# EAGLE board medidor-2 (EAGLE 9.6.2)
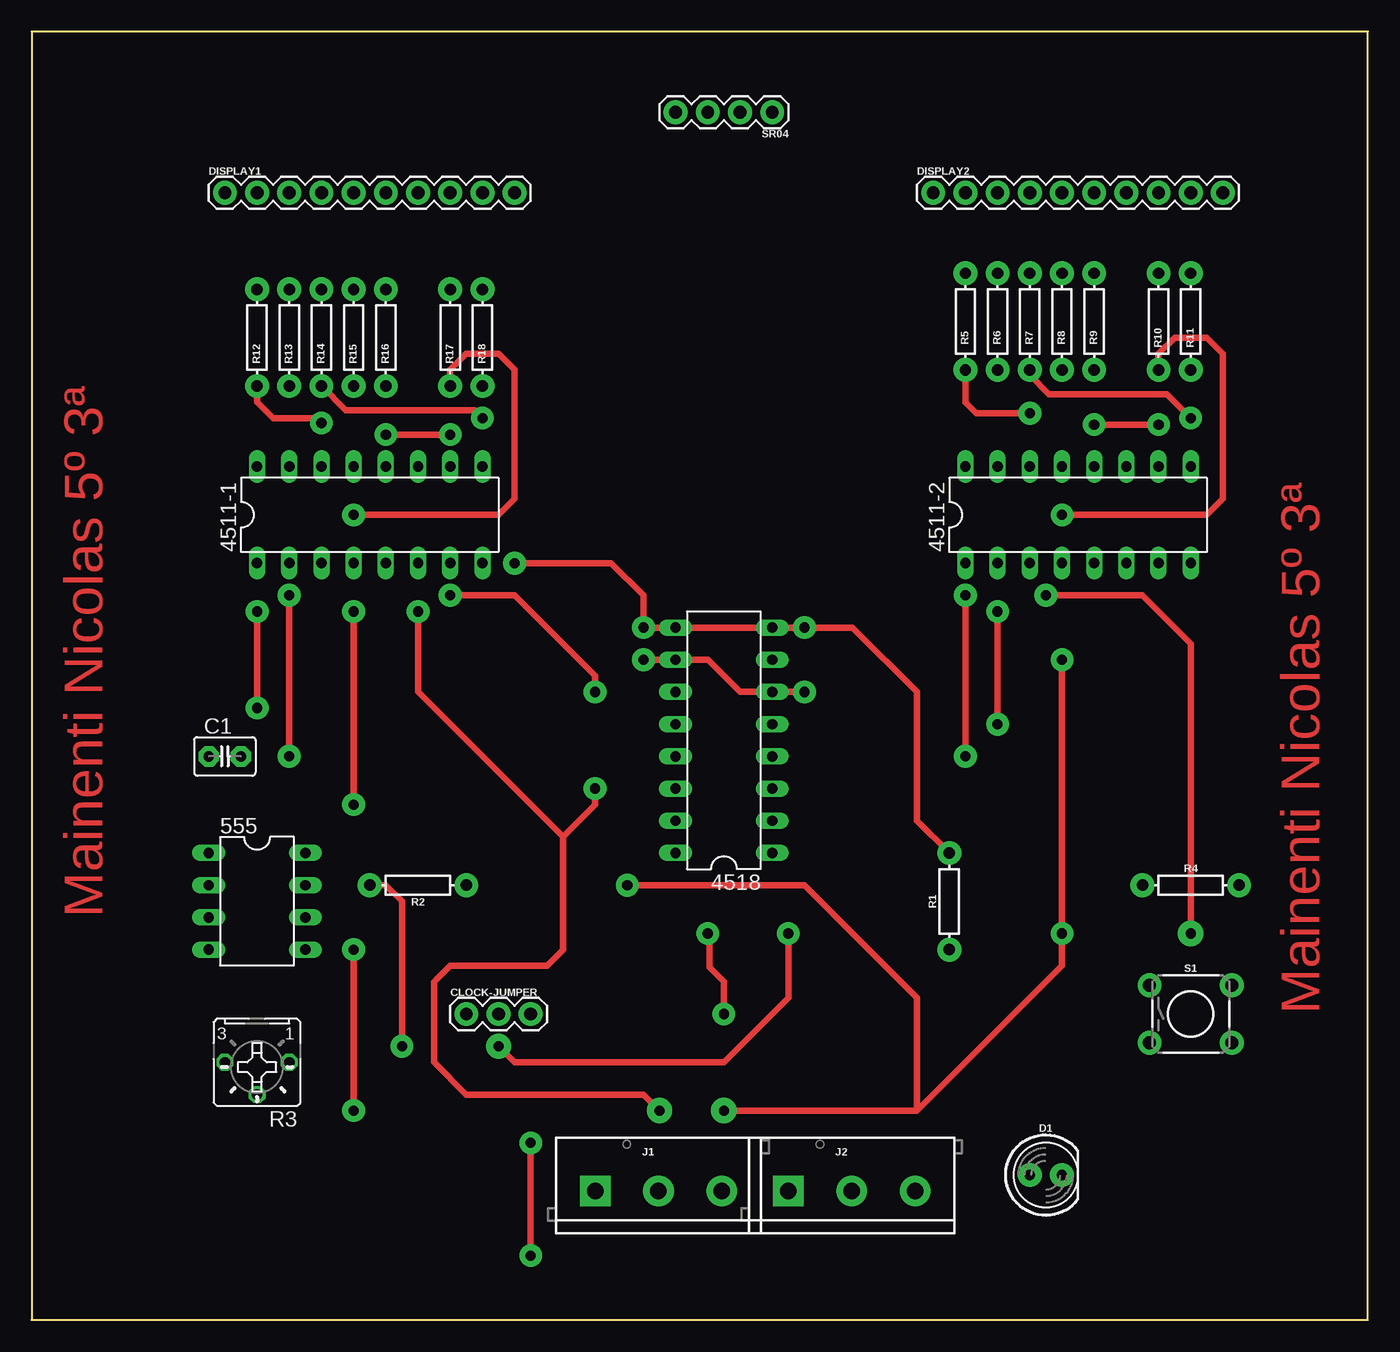
[diagram p0: board, top side]
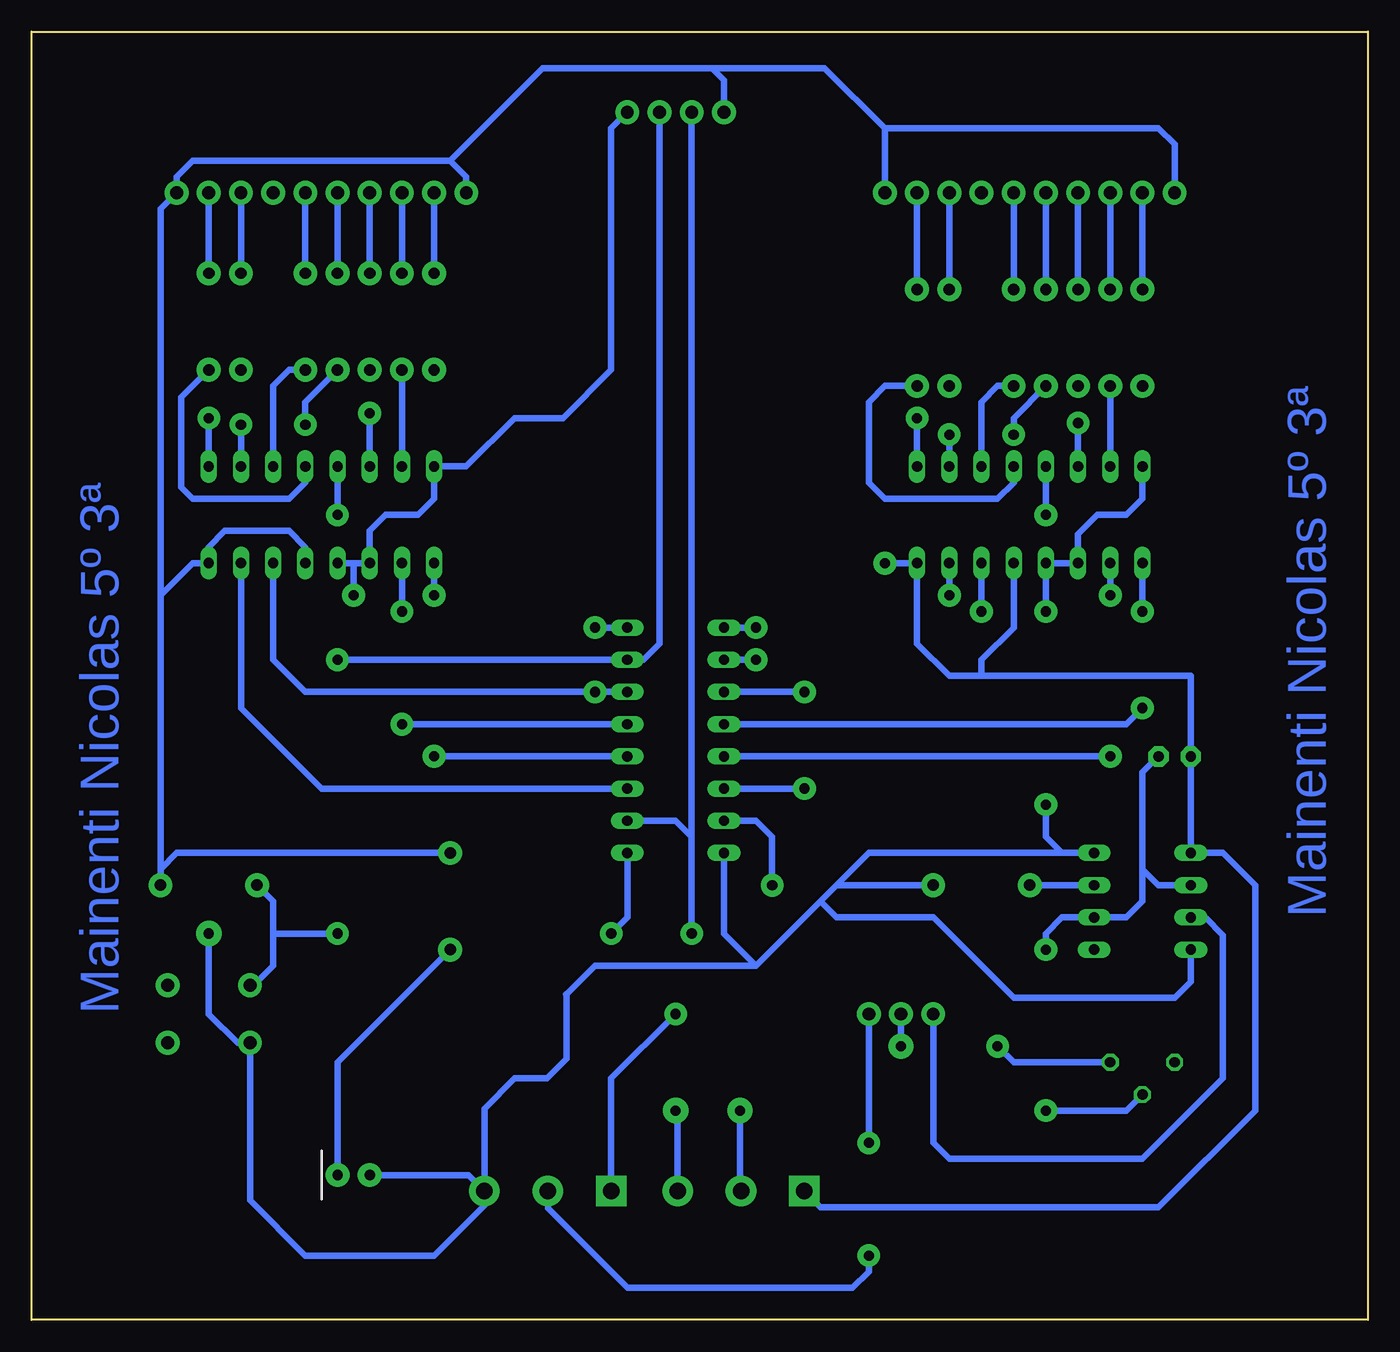
[diagram p1: board, bottom side, seen from below]

Size 105.41 x 101.6 mm. Coordinates in mm from the lower left corner, seen from the top.
Outline: 0,0 105.41,0 105.41,101.6 0,101.6 0,0
Copper layers (1*16): Top 0.035mm / dielectric 1.5mm / Bottom 0.035mm
Design rules "default": minimum track width 6mil, minimum drill 0.35mm, track to track 6mil, track to pad 6mil, pad to pad 6mil, via to via 6mil, smd to smd 6mil, copper to edge 40mil, drill to drill 6mil, minimum pad ring 10mil, minimum via ring 8mil, stop-mask expansion 4mil, vias tented up to drill 0mil, thermal gap 10mil

## Footprints (pad centres in the part's own frame; a part is rotated, then mirrored left to right if it is on the bottom)
DIL08 = drill 0.813 long: 1 -3.81,-3.81; 2 -1.27,-3.81; 3 1.27,-3.81; 4 3.81,-3.81; 5 3.81,3.81; 6 1.27,3.81; 7 -1.27,3.81; 8 -3.81,3.81
DIL16 = drill 0.813 long: 1 -8.89,-3.81; 2 -6.35,-3.81; 3 -3.81,-3.81; 4 -1.27,-3.81; 5 1.27,-3.81; 6 3.81,-3.81; 7 6.35,-3.81; 8 8.89,-3.81; 9 8.89,3.81; 10 6.35,3.81; 11 3.81,3.81; 12 1.27,3.81; 13 -1.27,3.81; 14 -3.81,3.81; 15 -6.35,3.81; 16 -8.89,3.81
C2.5-3 = drill 0.813 pad 1.6 octagon: 1 -1.27,0; 2 1.27,0
1X03 = drill 1.016 pad 1.88: 1 0,0; 2 2.54,0; 3 5.08,0
LED_5MM = drill 0.813 pad 1.88: A -1.27,0; K 1.27,0
1X10 = drill 1.016 pad 1.88: 1 0,0; 2 2.54,0; 3 5.08,0; 4 7.62,0; 5 10.16,0; 6 12.7,0; 7 15.24,0; 8 17.78,0; 9 20.32,0; 10 22.86,0
SCREWTERMINAL-5MM-3 = drill 1.3 pad 2.413 square: 1 0,0 | drill 1.3 pad 2.413: 2 5,0; 3 10,0
AXIAL-0.3 = drill 0.9 pad 1.88: P$1 -3.81,0; P$2 3.81,0
B25P = drill 0.813 octagon: A -2.54,0; E 2.54,0; S 0,2.54
TACTILE_SWITCH_PTH_6.0MM = drill 1.016 pad 1.88: 1 -3.251,2.261; 2 3.251,2.261; 3 -3.251,-2.261; 4 3.251,-2.261
1X04 = drill 1.016 pad 1.88: 1 0,0; 2 2.54,0; 3 5.08,0; 4 7.62,0

## Placement (x,y rotation side)
555  [DIL08]  17.78,33.02 270 top
4511-1  [DIL16]  26.67,63.5 0 top
4511-2  [DIL16]  82.55,63.5 0 top
4518  [DIL16]  54.61,45.72 90 top
C1  23nF  [C2.5-3]  15.24,44.45 0 top
CLOCK-JUMPER  455-1750-1-ND  [1X03]  34.29,24.13 0 top
D1  [LED_5MM]  80.01,11.43 0 top
DISPLAY1  [1X10]  15.24,88.9 0 top
DISPLAY2  [1X10]  71.12,88.9 0 top
J1  [SCREWTERMINAL-5MM-3]  44.45,10.16 0 top
J2  [SCREWTERMINAL-5MM-3]  59.69,10.16 0 top
R1  330  [AXIAL-0.3]  72.39,33.02 90 top
R2  2.2k  [AXIAL-0.3]  30.48,34.29 180 top
R3  5k  [B25P]  17.78,20.32 180 top
R4  10k  [AXIAL-0.3]  91.44,34.29 0 top
R5  330  [AXIAL-0.3]  73.66,78.74 90 top
R6  330  [AXIAL-0.3]  76.2,78.74 90 top
R7  330  [AXIAL-0.3]  78.74,78.74 90 top
R8  330  [AXIAL-0.3]  81.28,78.74 90 top
R9  330  [AXIAL-0.3]  83.82,78.74 90 top
R10  330  [AXIAL-0.3]  88.9,78.74 90 top
R11  330  [AXIAL-0.3]  91.44,78.74 90 top
R12  330  [AXIAL-0.3]  17.78,77.47 90 top
R13  330  [AXIAL-0.3]  20.32,77.47 90 top
R14  330  [AXIAL-0.3]  22.86,77.47 90 top
R15  330  [AXIAL-0.3]  25.4,77.47 90 top
R16  330  [AXIAL-0.3]  27.94,77.47 90 top
R17  330  [AXIAL-0.3]  33.02,77.47 90 top
R18  330  [AXIAL-0.3]  35.56,77.47 90 top
S1  MOMENTARY-SWITCH-SPST-PTH-6.0MM  [TACTILE_SWITCH_PTH_6.0MM]  91.44,24.13 0 top
SR04  [1X04]  58.42,95.25 180 top

## Library data of the parts
555 4511-1 4511-2 4518 = ic-package
C1 = capacitor-wima
CLOCK-JUMPER = SparkFun-Connectors; PROD_ID: XXX-00000
D1 = SparkFun-LED
DISPLAY1 DISPLAY2 = SparkFun-Connectors; PROD_ID: CONN-11563
J1 J2 = SparkFun-Connectors; PROD_ID: CONN-10134; SF_SKU: PRT-08433
R1 R2 R4-R18 = SparkFun-Resistors; PROD_ID: RES-09435
R3 = pot
S1 = SparkFun-Switches; PROD_ID: SWCH-08441; SF_SKU: COM-00097
SR04 = SparkFun-Connectors; PROD_ID: CONN-09696

## Nets
1-A: 4511-2.7 4518.3
1-B: 4511-2.1 4518.4
1-C: 4511-2.2 4518.5
1-D: 4511-2.6 4518.6 4518.10
2-A: 4511-1.7 4518.11
2-B: 4511-1.1 4518.12
2-C: 4511-1.2 4518.13
2-D: 4511-1.6 4518.14 J1.2
5V: 555.4 555.8 4511-1.3 4511-1.4 4511-1.16 4511-2.3 4511-2.4 4511-2.16 4518.16 D1.A J2.3 R2.P$1 S1.3 SR04.1
CLOCK-555: 555.3 CLOCK-JUMPER.1
CLOCK-A: 4518.1 CLOCK-JUMPER.2
CLOCK-EXT: CLOCK-JUMPER.3 J2.2
D1-A: 4511-1.13 R17.P$1
D1-B: 4511-1.12 R18.P$1
D1-C: 4511-1.11 R16.P$1
D1-D: 4511-1.10 R15.P$1
D1-E: 4511-1.9 R14.P$1
D1-F: 4511-1.15 R13.P$1
D1-G: 4511-1.14 R12.P$1
D2-A: 4511-2.13 R10.P$1
D2-B: 4511-2.12 R11.P$1
D2-C: 4511-2.11 R9.P$1
D2-D: 4511-2.10 R8.P$1
D2-E: 4511-2.9 R7.P$1
D2-F: 4511-2.15 R6.P$1
D2-G: 4511-2.14 R5.P$1
ENABLE-A: 4518.2 J2.1 SR04.3
GND: 555.1 4511-1.5 4511-1.8 4511-2.5 4511-2.8 4518.8 4518.9 C1.1 DISPLAY1.1 DISPLAY1.10 DISPLAY2.1 DISPLAY2.10 J1.1 R1.P$2 R4.P$2 SR04.4
N$1: D1.K R1.P$1
N$2: DISPLAY1.2 R12.P$2
N$3: 555.7 R2.P$2 R3.A
N$5: 555.2 555.6 C1.2 R3.S
N$6: DISPLAY1.3 R13.P$2
N$7: DISPLAY1.4 R14.P$2
N$8: DISPLAY1.5 R15.P$2
N$9: DISPLAY1.6 R16.P$2
N$10: DISPLAY1.8 R17.P$2
N$11: DISPLAY1.9 R18.P$2
N$12: DISPLAY2.2 R5.P$2
N$13: DISPLAY2.3 R6.P$2
N$14: DISPLAY2.4 R7.P$2
N$15: DISPLAY2.5 R8.P$2
N$16: DISPLAY2.6 R9.P$2
N$17: DISPLAY2.8 R10.P$2
N$18: DISPLAY2.9 R11.P$2
RESET-A-B: 4518.7 4518.15 J1.3 R4.P$1 S1.1 SR04.2

## Tracks (layer width: path | path; a pad name or v marks a point on that pad's centre or on a via)
1-A
  Bottom 0.508: 4518.3 82.55,41.91 88.9,48.26 4511-2.7
1-B  (via drill 0.8 pad 1.8)
  Top 0.508: v73.66,57.15 v73.66,44.45
  Bottom 0.508: v73.66,57.15 4511-2.1 | 4518.4 v73.66,44.45
1-C  (via drill 0.8 pad 1.8)
  Top 0.508: v76.2,46.99 v76.2,55.88
  Bottom 0.508: 4518.5 v76.2,46.99 | 4511-2.2 v76.2,55.88
1-D  (via drill 0.8 pad 1.8)
  Top 0.508: v48.26,52.07 53.34,52.07 55.88,49.53 v60.96,49.53
  Bottom 0.508: 4518.6 v60.96,49.53 83.82,49.53 86.36,52.07 4511-2.6 | 4518.10 v48.26,52.07
2-A  (via drill 0.8 pad 1.8)
  Top 0.508: v33.02,57.15 38.1,57.15 44.45,50.8 v44.45,49.53
  Bottom 0.508: 4518.11 v44.45,49.53 | 4511-1.7 v33.02,57.15
2-B  (via drill 0.8 pad 1.8)
  Top 0.508: v17.78,55.88 v17.78,48.26
  Bottom 0.508: 4511-1.1 v17.78,55.88 | v17.78,48.26 19.05,46.99 4518.12
2-C  (via drill 0.8 pad 1.8)
  Top 0.508: v20.32,44.45 v20.32,57.15
  Bottom 0.508: 4511-1.2 v20.32,57.15 | 4518.13 v20.32,44.45
2-D  (via drill 0.8 pad 1.8, 0.8 pad 2)
  Top 0.508: 41.91,38.1 41.91,29.21 40.64,27.94 33.02,27.94 31.75,26.67 31.75,20.32 34.29,17.78 48.26,17.78 v49.53,16.51 | 41.91,38.1 30.48,49.53 v30.48,55.88 | 41.91,38.1 44.45,40.64 v44.45,41.91
  Bottom 0.508: v49.53,16.51 49.53,10.24 J1.2 | v44.45,41.91 4518.14 | 4511-1.6 v30.48,55.88
5V  (via drill 0.8 pad 1.78, 0.8 pad 1.8, 0.8 pad 2)
  Top 0.508: v25.4,40.64 v25.4,55.88 | v80.01,57.15 87.63,57.15 91.44,53.34 v91.44,30.48
  Bottom 0.508: 63.22,25.68 60.96,27.94 48.26,27.94 | 48.26,27.94 43.18,33.02 | 43.18,33.02 41.91,34.29 | 41.91,34.29 R2.P$1 | 41.91,34.29 39.37,36.83 24.13,36.83 | 24.13,36.83 555.8 | 43.18,33.02 41.91,31.75 34.29,31.75 27.94,25.4 15.24,25.4 13.97,26.67 555.4 | v25.4,55.88 4511-1.4 4511-1.3 22.86,61.98 21.34,63.5 19.05,63.5 17.78,64.77 4511-1.16 | v25.4,40.64 25.4,38.1 24.13,36.83 | 63.22,25.68 63.25,25.71 | 4511-2.4 80.01,59.69 | 80.01,59.69 4511-2.3 78.74,62.23 77.47,63.5 74.93,63.5 73.66,64.77 4511-2.16 71.12,67.31 67.31,71.12 63.5,71.12 59.69,74.93 59.69,93.98 SR04.1 | 80.01,59.69 v80.01,57.15 | J2.3 69.69,9.05 73.66,5.08 83.82,5.08 88.19,9.45 S1.3 89.18,21.87 91.44,24.13 v91.44,30.48 | D1.A 70.96,11.43 J2.3 | J2.3 69.69,16.67 67.31,19.05 64.77,19.05 63.22,20.6 63.22,25.68 | 4518.16 50.8,30.48 48.26,27.94
CLOCK-555
  Bottom 0.508: CLOCK-JUMPER.1 34.29,13.97 33.02,12.7 17.78,12.7 11.43,19.05 11.43,30.35 12.83,31.75 555.3
CLOCK-A  (via drill 0.8 pad 1.8, 0.8 pad 2)
  Top 0.508: v36.83,21.59 38.1,20.32 54.61,20.32 59.69,25.4 v59.69,30.48
  Bottom 0.508: v36.83,21.59 CLOCK-JUMPER.2 | v59.69,30.48 58.42,31.75 4518.1
CLOCK-EXT  (via drill 0.8 pad 1.78)
  Top 0.508: v39.37,13.97 v39.37,5.08
  Bottom 0.508: CLOCK-JUMPER.3 v39.37,13.97 | v39.37,5.08 39.37,3.81 40.64,2.54 58.42,2.54 64.69,8.81 J2.2
D1-A  (via drill 0.8 pad 1.78)
  Top 0.508: v25.4,63.5 36.83,63.5 38.1,64.77 38.1,74.93 36.83,76.2 34.29,76.2 33.02,74.93 R17.P$1
  Bottom 0.508: v25.4,63.5 4511-1.13
D1-B
  Bottom 0.508: R18.P$1 38.1,73.66 39.37,72.39 39.37,66.04 38.1,64.77 29.21,64.77 27.94,66.04 4511-1.12
D1-C
  Bottom 0.508: R16.P$1 29.21,73.66 30.48,72.39 4511-1.11
D1-D  (via drill 0.8 pad 1.78)
  Top 0.508: v27.94,69.83 v33.02,69.83
  Bottom 0.508: R15.P$1 27.94,71.12 v27.94,69.83 | v33.02,69.83 4511-1.10
D1-E  (via drill 0.8 pad 1.78)
  Top 0.508: v35.56,71.12 34.92,71.75 24.77,71.75 R14.P$1
  Bottom 0.508: v35.56,71.12 4511-1.9
D1-F
  Bottom 0.508: R13.P$1 4511-1.15
D1-G  (via drill 0.8 pad 1.78)
  Top 0.508: v22.86,70.74 22.48,71.12 19.05,71.12 17.78,72.39 R12.P$1
  Bottom 0.508: v22.86,70.74 4511-1.14
D2-A  (via drill 0.8 pad 1.78)
  Top 0.508: v81.28,63.5 92.71,63.5 93.98,64.77 93.98,76.2 92.71,77.47 90.17,77.47 88.9,76.2 R10.P$1
  Bottom 0.508: v81.28,63.5 4511-2.13
D2-B
  Bottom 0.508: R11.P$1 93.6,72.77 93.6,65.66 92.71,64.77 85.09,64.77 83.82,66.04 4511-2.12
D2-C
  Bottom 0.508: R9.P$1 85.09,74.93 86.36,73.66 4511-2.11
D2-D  (via drill 0.8 pad 1.78)
  Top 0.508: v83.82,70.61 v88.9,70.61
  Bottom 0.508: R8.P$1 83.82,72.39 v83.82,70.61 | v88.9,70.61 4511-2.10
D2-E  (via drill 0.8 pad 1.78)
  Top 0.508: v91.44,71.12 89.53,73.03 80.26,73.03 78.74,74.55 R7.P$1
  Bottom 0.508: v91.44,71.12 4511-2.9
D2-F
  Bottom 0.508: R6.P$1 4511-2.15
D2-G  (via drill 0.8 pad 1.8)
  Top 0.508: v78.74,71.5 74.55,71.5 73.66,72.39 R5.P$1
  Bottom 0.508: v78.74,71.5 4511-2.14
ENABLE-A  (via drill 0.8 pad 1.78)
  Top 0.508: v53.34,30.48 53.47,30.35 53.47,27.81 54.61,26.67 v54.61,24.13
  Bottom 0.508: SR04.3 53.34,38.1 | 53.34,38.1 v53.34,30.48 | 54.95,23.79 v54.61,24.13 59.69,19.05 J2.1 | 53.34,38.1 54.61,39.37 4518.2
GND  (via drill 0.8 pad 1.8)
  Top 0.508: v38.1,59.69 45.72,59.69 48.26,57.15 v48.26,54.61 v60.96,54.61 64.77,54.61 69.85,49.53 69.85,39.37 R1.P$2
  Bottom 0.508: 30.48,50.8 13.97,50.8 C1.1 555.1 11.43,36.83 8.89,34.29 8.89,16.51 16.51,8.89 43.18,8.89 J1.1 | 30.48,50.8 33.02,50.8 35.56,53.34 4511-1.8 v38.1,59.69 | 30.48,50.8 30.48,52.07 27.94,54.61 4511-1.5 | R4.P$2 95.25,35.56 | 95.25,35.56 95.25,57.15 | 95.25,57.15 95.25,87.63 DISPLAY2.10 93.98,90.17 92.71,91.44 72.39,91.44 | 72.39,91.44 71.12,90.17 DISPLAY2.1 | 72.39,91.44 65.1,98.73 51.74,98.73 | 51.74,98.73 50.8,97.79 SR04.4 | 38.1,93.98 42.85,98.73 51.74,98.73 | 38.1,93.98 DISPLAY1.10 | DISPLAY1.1 15.24,92.71 16.51,93.98 38.1,93.98 | 95.25,57.15 92.71,59.69 4511-2.8 91.44,60.96 90.17,62.23 85.09,62.23 83.82,60.96 4511-2.5 | R1.P$2 93.98,36.83 95.25,35.56 | 4518.9 v48.26,54.61 | 4518.8 v60.96,54.61
N$1
  Bottom 0.508: R1.P$1 81.28,20.32 D1.K
N$2
  Bottom 0.508: R12.P$2 DISPLAY1.2
N$3  (via drill 0.8 pad 1.78)
  Top 0.508: R2.P$2 27.94,34.29 29.21,33.02 v29.21,21.59
  Bottom 0.508: R2.P$2 555.7 | v29.21,21.59 27.94,20.32 R3.A
N$5  (via drill 0.8 pad 1.78)
  Top 0.508: v25.4,16.51 v25.4,29.21
  Bottom 0.508: C1.2 17.78,43.18 17.78,35.56 | 17.78,35.56 16.51,34.29 555.2 | 17.78,35.56 17.78,33.02 19.05,31.75 555.6 24.13,31.75 25.4,30.48 v25.4,29.21 | R3.S 19.05,16.51 v25.4,16.51
N$6
  Bottom 0.508: DISPLAY1.3 R13.P$2
N$7
  Bottom 0.508: R14.P$2 DISPLAY1.4
N$8
  Bottom 0.508: DISPLAY1.5 R15.P$2
N$9
  Bottom 0.508: R16.P$2 DISPLAY1.6
N$10
  Bottom 0.508: DISPLAY1.8 R17.P$2
N$11
  Bottom 0.508: R18.P$2 DISPLAY1.9
N$12
  Bottom 0.508: R5.P$2 DISPLAY2.2
N$13
  Bottom 0.508: R6.P$2 DISPLAY2.3
N$14
  Bottom 0.508: DISPLAY2.4 R7.P$2
N$15
  Bottom 0.508: R8.P$2 DISPLAY2.5
N$16
  Bottom 0.508: DISPLAY2.6 R9.P$2
N$17
  Bottom 0.508: R10.P$2 DISPLAY2.8
N$18
  Bottom 0.508: R11.P$2 DISPLAY2.9
RESET-A-B  (via drill 0.8 pad 1.78, 0.8 pad 1.8, 0.8 pad 2)
  Top 0.508: v81.28,52.07 v81.28,30.48 81.28,27.94 69.85,16.51 | 69.85,16.51 v54.61,16.51 | v46.99,34.29 60.96,34.29 69.85,25.4 69.85,16.51
  Bottom 0.508: R4.P$1 86.36,33.02 86.36,30.48 | 86.36,30.48 86.36,27.94 87.91,26.39 S1.1 | SR04.2 55.88,53.34 57.15,52.07 4518.7 v81.28,52.07 | 86.36,30.48 v81.28,30.48 | J1.3 54.45,16.35 v54.61,16.51 | 4518.15 48.26,39.37 46.99,38.1 v46.99,34.29

## Text on the board
Top: Mainenti Nicolas 5º 3ª | Mainenti Nicolas 5º 3ª
Bottom: Mainenti Nicolas 5º 3ª | Mainenti Nicolas 5º 3ª